# Altium PCB 三轮主控板基础板2.3.PcbDoc (part 1 of 2)
Units mil, origin at the board's own origin, x right, y up, seen from the top; angles counter-clockwise.
Board outline 6000 x 4000 mil, 2 copper layers (Top Layer, Bottom Layer); 78 components, 90 nets, 319 pads, 48 vias.
Unrouted connection lines stored in the file: 1.
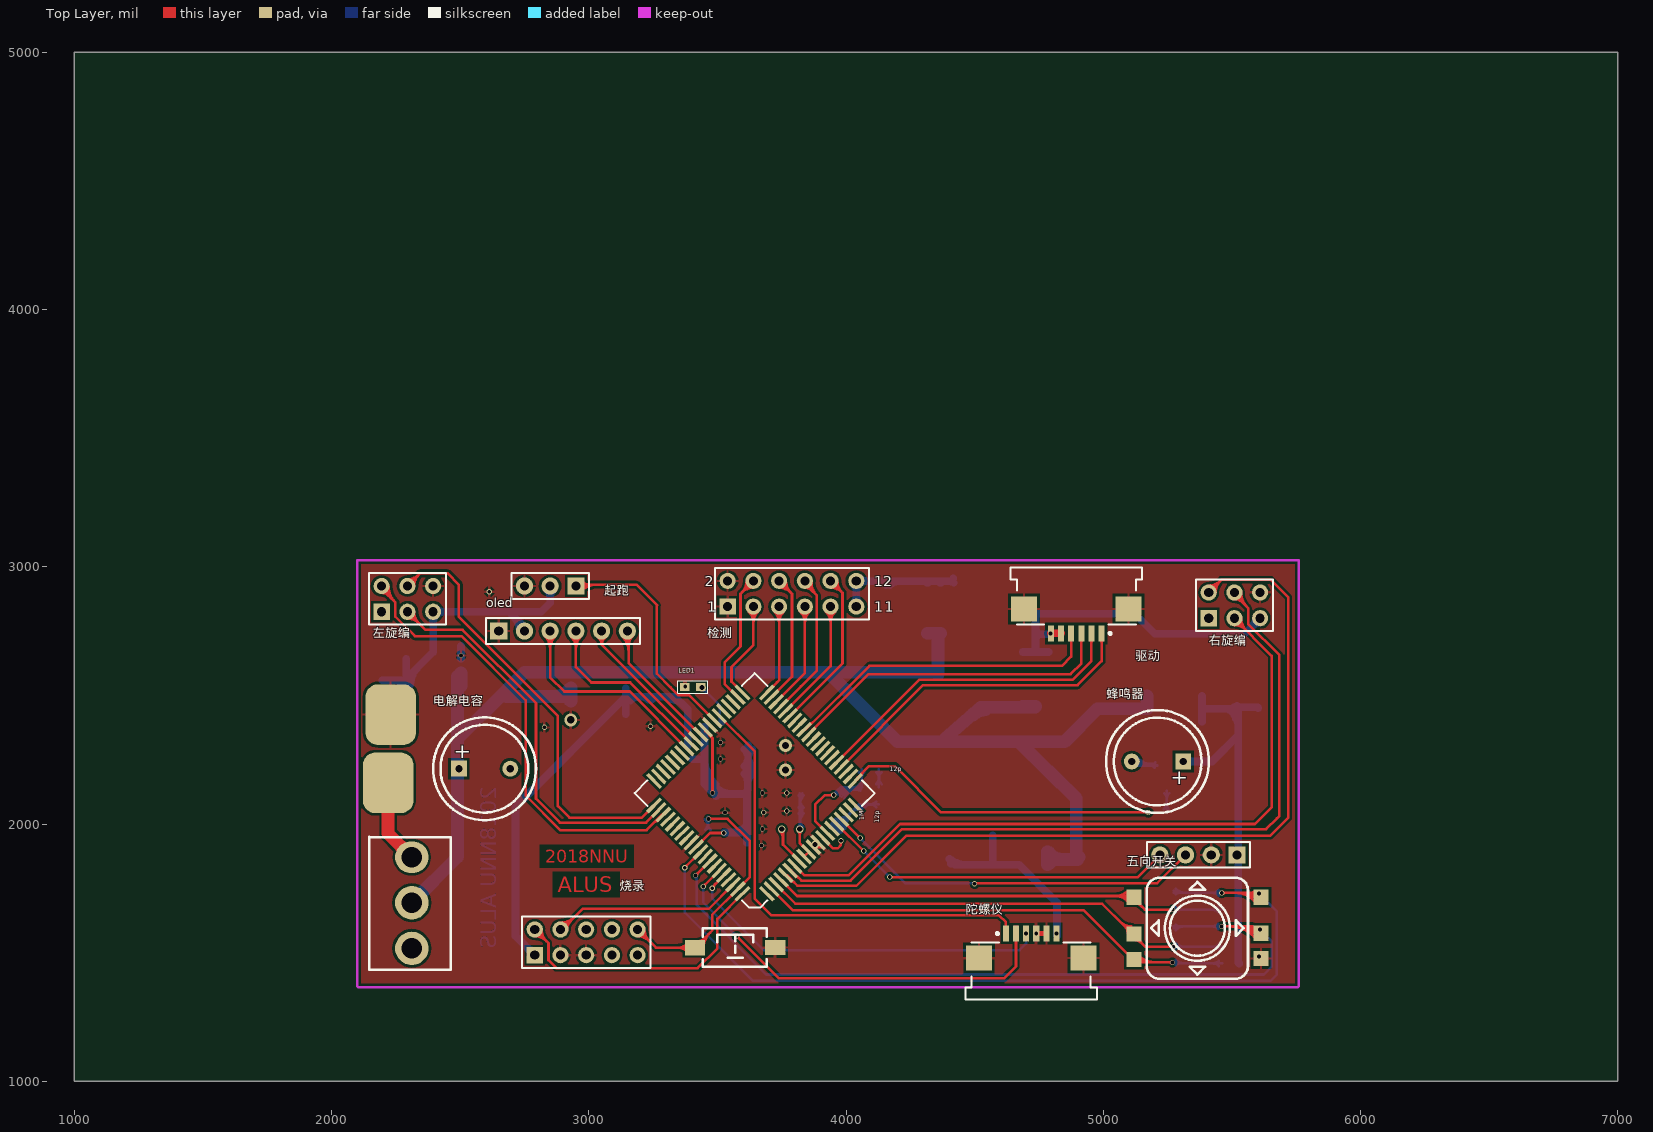
[diagram p0: Top Layer view]
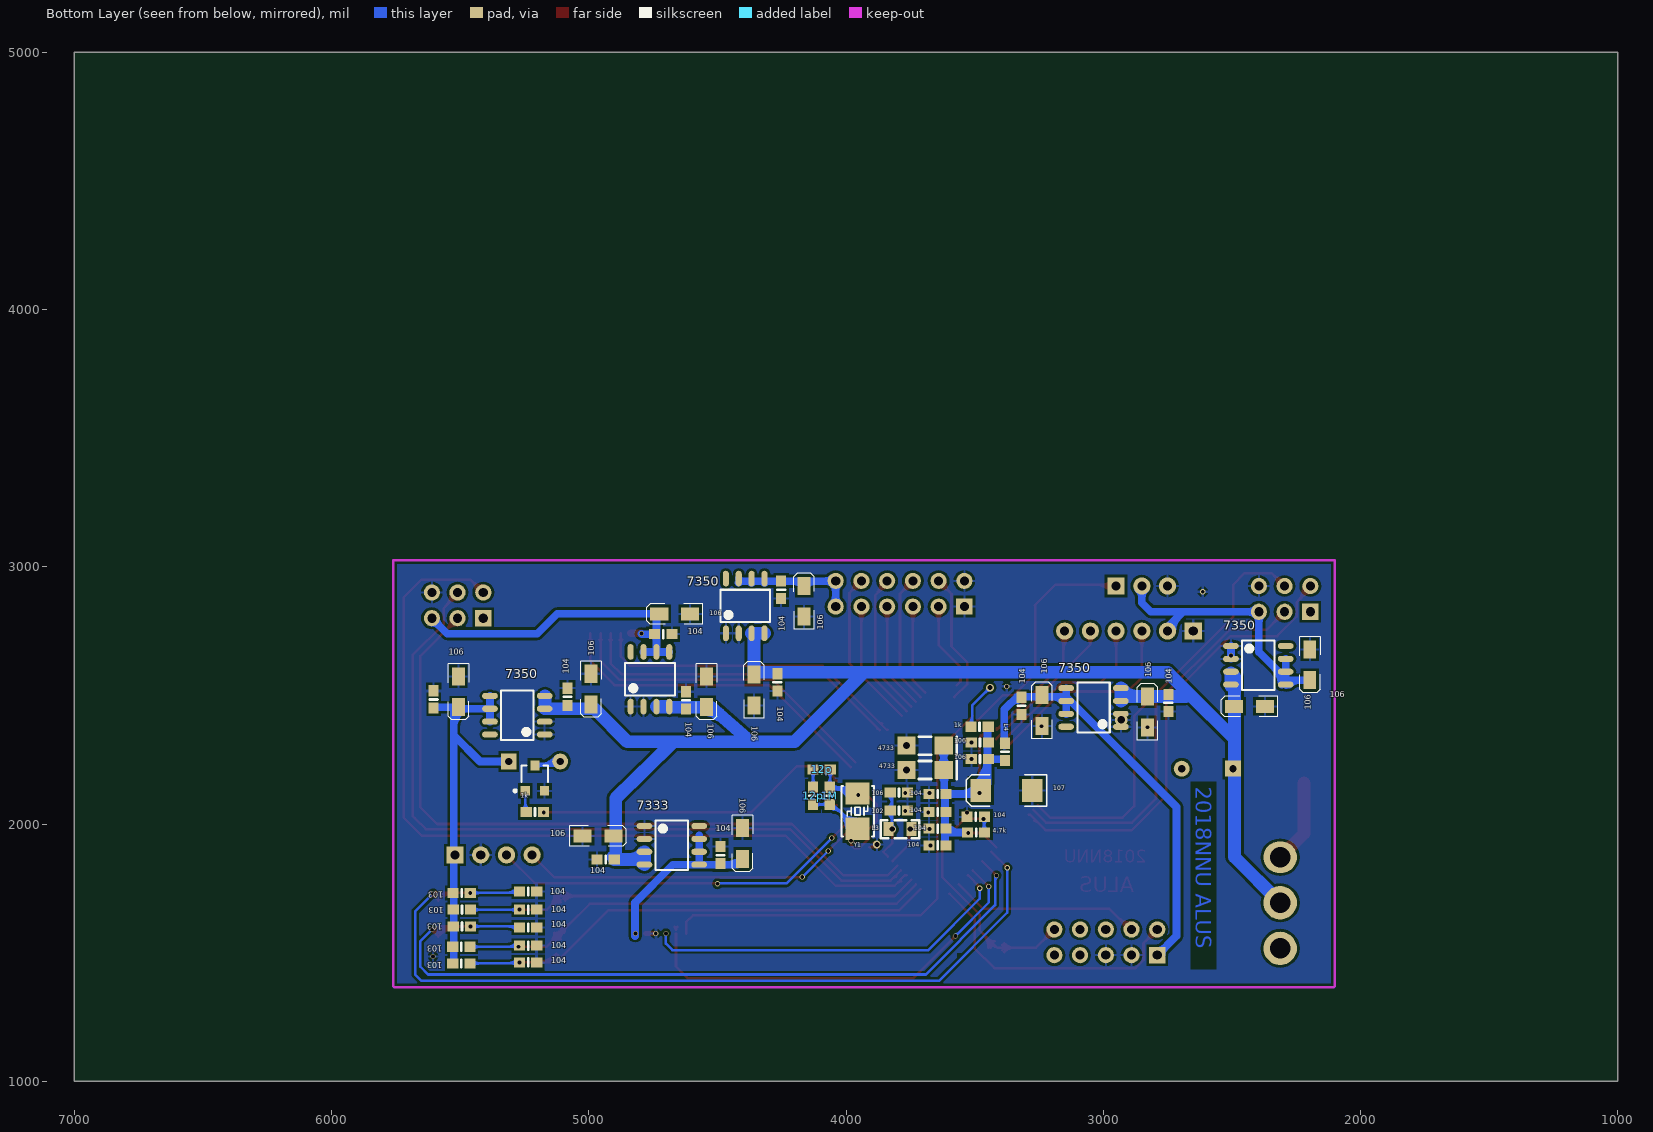
[diagram p1: Bottom Layer view, seen from below]

## Layer stack, top to bottom
Top Layer: signal copper 1.4
Dielectric: dielectric 12.6, FR-4, Dk 4.8
Bottom Layer: signal copper 1.4

## Board outline
1000,1000 7000,1000 7000,5000 1000,5000

## Design rules (kind name [scope] priority, off if disabled: settings)
Clearance [All] p1: gap=10
PolygonConnect [All] p1: connectstyle=Relief reliefconductorwidth=10 reliefentries=4 polygonreliefangle="90 Angle"
RoutingVias [All] p1: holewidth=28 width=50 viastyle="Through Hole" minholewidth=28 minwidth=50 maxholewidth=28 maxwidth=50
SilkscreenOverComponentPads [All] p1: minsilkscreentomaskgap=10
SolderMaskExpansion [All] p1: expansion=4
Width [All] p1: maxlimit=50 minlimit=10 preferedwidth=10
27 further rules are at their usual default settings.

## Classes and differential pairs
component class jicheng: 1k 1M 4.7k 12p 102 103 106 107 4733 CON4 J2 J6 L3 L4 LED1 S9KEAZ128AML U? Y1 五向

## Components (designator, comment, footprint, x,y, rotation, side; value= is the part's Value field where it differs from the comment)
1k "1k" 0603C 3480,2380 r180 bottom (schematic designator R5)
1k "" 0603C 5210,2045 r0 bottom
1M "1M" 0603C 4065,2110 r90 bottom (schematic designator R8)
4.7k "4.7k" 0603C 3495,1965 r0 bottom (schematic designator R7)
12p "12p" 0603C 4130,2110 r90 bottom (schematic designator C23)
12p "12p" 0603C 4095,2210 r0 bottom (schematic designator C21)
102 "102" 0603C 3795,2050 r0 bottom (schematic designator C9)
103 "" 0603C 5493.93,1665 r0 bottom
103 "" 0603C 5495,1525 r180 bottom
103 "" 0603C 5495,1460 r180 bottom
103 "" 0603C 5495,1730 r0 bottom
103 "" 0603C 5493.93,1600 r0 bottom
104 "Comment" 0603C 4490,1880 r90 bottom
104 "Comment" 0603C 4935,1860 r0 bottom
104 "104" 0603C 3495,2030 r180 bottom (schematic designator C20)
104 "104" 0603C 3645,1915 r0 bottom (schematic designator C17)
104 "104" 0603C 3645,2045 r0 bottom (schematic designator C13)
104 "104" 0603C 3645,2115 r0 bottom (schematic designator C10)
104 "104" 0603C 3645,1980 r0 bottom (schematic designator C5)
104 "" 0603C 4265,2550 r270 bottom
104 "" 0603C 4250,2910 r270 bottom
104 "" 0603C 3320,2460 r90 bottom
104 "" 0603C 5085,2495 r90 bottom
104 "" 0603C 4710,2740 r180 bottom
104 "" 0603C 2745,2470 r270 bottom
104 "" 0603C 5235,1740 r180 bottom
104 "" 0603C 5236.07,1525 r0 bottom
104 "" 0603C 5235,1600 r180 bottom
104 "" 0603C 5236.07,1460 r0 bottom
104 "" 0603C 4620,2480 r270 bottom
104 "" 0603C 5236.07,1665 r0 bottom
106 "106" 0603C 3480,2315 r0 bottom (schematic designator C8)
106 "106" 0603C 3480,2250 r0 bottom (schematic designator C7)
106 "10u" 0603C 3795,2120 r0 bottom (schematic designator C4)
106 "" 106 2825,2435 r270 bottom
106 "" 106 4355,2520 r270 bottom
106 "" 106 4545,2515 r90 bottom
106 "" 106 4965,1950 r0 bottom
106 "" 106 2200,2620 r90 bottom
106 "" 106 2430,2460 r180 bottom
106 "" 106 4995,2525 r90 bottom
106 "" 106 5510,2515 r90 bottom
106 "" 106 4665,2820 r180 bottom
106 "" 106 4405,1925 r90 bottom
106 "" 106 4160,2865 r270 bottom
106 "" 106 3235,2440 r270 bottom
107 "100uf" 107 3380,2125 r270 bottom (schematic designator C1)
4733 "4733" SMA 3765,2210 r180 bottom (schematic designator D5)
4733 "4733" SMA 3765,2305 r180 bottom (schematic designator D4)
7333 "TPS7350a" TPS7333 4680,1915 r180 bottom (schematic designator *)
7350 "TPS7350a" TPS7333 3035,2455 r0 bottom (schematic designator *)
7350 "TPS7350a" TPS7333 4390,2845 r90 bottom (schematic designator *)
7350 "TPS7333c" TPS7333 2400,2615 r180 bottom (schematic designator *)
7350 "TPS7350a" TPS7333 5275,2425 r0 bottom (schematic designator *)
* "TPS7350a" TPS7333 4760,2560 r90 bottom
L3 "1000omH" "L 0805" 3790,1980 r0 bottom
L4 "bead" 0603C 3380,2280 r270 bottom
LED1 "红色" 0603r 3405,2530 r180 top
oled "屏幕" HDR2.54-LI-6P 2900,2750 r0 top (schematic designator J6)
RST "3x6x5" "TSW SMD-3*6*2.5" 3570,1520 r0 top
U? "KEAZ128MLK4" TQFP65P1650X1650X150-80N 3645,2120 r135 top
Y1 "16M" "OSC 5032-2P" 3955,2050 r270 bottom
五向开关 "CSW-3P" 五项开关 5380,1590 r270 top
右旋编 "左旋编" HDR2.54-LI-2x3P 5510,2850 r0 top (schematic designator J1)
左旋编 "右旋编" HDR2.54-LI-2x3P 2295,2875 r0 top (schematic designator J2)
检测 "Comment" HDR2.54-LI-2x6P 3790,2895 r0 top
烧录 "Header 5X2" HDR2.54-LI-2x5P 2990,1540 r0 top (schematic designator 烧录口)
电解电容 "Comment" 蜂鸣器#1 2495,2215 r0 top
蜂鸣器 "蜂鸣器" 蜂鸣器#2 5225,2240 r0 top (schematic designator C?)
起跑 "起跑" HDR2.54-LI-3P 2850,2925 r180 top (schematic designator J5)
陀螺仪 "陀螺仪" FH12-6S-1.0SH#1 4720,1510 r0 top (schematic designator J4)
驱动 "驱动" FH12-6S-1.0SH#2 4895,2805 r180 top (schematic designator J3)
? "" NPN 5220,2170 r0 bottom
? "" 开关 2310,1700 r0 top
? "" 电源焊盘 2230,2425 r0 top
? "Comment" 电源焊盘 2220,2160 r0 top
? "Comment" HDR2.54-LI-4P 5370,1880 r180 top
? "Comment" 0603C 5605,2485 r90 bottom

## Footprints (in the part's own frame and the unit in brackets; to place one, negate y for a bottom-side part, rotate by r counter-clockwise, add the part's x,y. Pads: shape width x height; smd on the part's side, far side on the other; paste and mask are expansions set on the pad)
106 [mil]
  rect 70.08x50 smd: 1(-61,-3) 2(59.08,-3)
  silkscreen extent -110,-43 108,37
107 [mil]
  rect 89.76x79.92 smd: 1(-5,-96) 2(-5,104)
  silkscreen extent -66,-152 56,160
0603C [mm]
  rect 1.1x1 smd: 1(-0.864,-0.051) 2(0.836,-0.051)
  silkscreen extent -0.03,-0.43 -0.03,0.33
0603r [mm]
  rect 0.965x0.8 smd: 1(-0.762,-0.051) 2(0.813,-0.051)
  silkscreen extent -1.45,-0.66 1.5,0.56
FH12-6S-1.0SH#1 [mm] "Connector; FH12 Ser"
  rect 2.6x2.5 smd: 0(-5.156,-0.787) 0(5.156,-0.787)
  rect 0.6x1.6 smd: 1(-2.5,1.625) 3(-0.5,1.625) 4(0.5,1.625) 5(1.5,1.625) 6(2.5,1.625)
  rect 0.6x1.6 smd paste+0: 2(-1.5,1.625)
  silkscreen extent -6.5,-4.88 6.48,1.75, body extent -6.5,-4.9 6.5,1.9, height 2.8
FH12-6S-1.0SH#2 [mm] "Connector; FH12 Ser"
  rect 2.6x2.5 smd: 0(-5.156,-0.787) 0(5.156,-0.787)
  rect 0.6x1.6 smd: 1(-2.5,1.625) 2(-1.5,1.625) 3(-0.5,1.625) 4(0.5,1.625) 5(1.5,1.625) 6(2.5,1.625)
  silkscreen extent -6.5,-4.88 6.48,1.75, body extent -6.5,-4.9 6.5,1.9, height 2.8
HDR2.54-LI-2x3P [mm]
  rect 1.6x1.6 hole 0.9: 1(-2.54,-1.27)
  round 1.6 hole 0.9: 2(-2.54,1.27) 3(0,-1.27) 4(0,1.27) 5(2.54,-1.27) 6(2.54,1.27)
  silkscreen extent -3.81,-2.54 3.81,2.54, body extent -3.81,-2.54 3.81,2.54, height 8.5
HDR2.54-LI-2x5P [mm]
  rect 1.6x1.6 hole 0.9: 1(-5.08,-1.27)
  round 1.6 hole 0.9: 2(-5.08,1.27) 3(-2.54,-1.27) 4(-2.54,1.27) 5(0,-1.27) 6(0,1.27) 7(2.54,-1.27) 8(2.54,1.27) 9(5.08,-1.27) 10(5.08,1.27)
  silkscreen extent -6.35,-2.54 6.35,2.54, body extent -6.35,-2.54 6.35,2.54, height 8.5
HDR2.54-LI-2x6P [mm]
  rect 1.6x1.6 hole 0.9: 1(-6.35,-1.27)
  round 1.6 hole 0.9: 2(-6.35,1.27) 3(-3.81,-1.27) 4(-3.81,1.27) 5(-1.27,-1.27) 6(-1.27,1.27) 7(1.27,-1.27) 8(1.27,1.27) 9(3.81,-1.27) 10(3.81,1.27) 11(6.35,-1.27) 12(6.35,1.27)
  silkscreen extent -7.62,-2.54 7.62,2.54, body extent -7.62,-2.54 7.62,2.54, height 8.5
HDR2.54-LI-3P [mm]
  rect 1.7x1.7 hole 0.9: 1(-2.54,0)
  round 1.7 hole 0.9: 2(0,0) 3(2.54,0)
  silkscreen extent -3.81,-1.27 3.81,1.27, body extent -3.81,-1.27 3.81,1.27, height 8.5
HDR2.54-LI-4P [mm]
  rect 1.7x1.7 hole 0.9: 1(-3.81,0)
  round 1.7 hole 0.9: 2(-1.27,0) 3(1.27,0) 4(3.81,0)
  silkscreen extent -5.08,-1.27 5.08,1.27, body extent -5.08,-1.27 5.08,1.27, height 8.5
HDR2.54-LI-6P [mm]
  rect 1.7x1.7 hole 0.9: 1(-6.35,0)
  round 1.7 hole 0.9: 2(-3.81,0) 3(-1.27,0) 4(1.27,0) 5(3.81,0) 6(6.35,0)
  silkscreen extent -7.62,-1.27 7.62,1.27, body extent -7.62,-1.27 7.62,1.27, height 8.5
"L 0805" [mil] "小功率"
  rect 40x55 smd: 1(-45,0) 2(45,0)
  silkscreen extent -75,-35 75,35, body extent -39,-24 39,24, height 35
NPN [mm]
  rect 0.9x0.95 smd: 1(0.686,1.041) 2(-1.214,1.041) 3(-0.264,-1.459)
  silkscreen extent -1.56,-1.46 1.81,1.17
"OSC 5032-2P" [mm]
  rect 2.2x2.4 smd: 1(-1.75,0) 2(1.75,0)
  silkscreen extent -2.5,-1.6 2.5,1.6, body extent -2.5,-1.6 2.5,1.6, height 0.86
SMA [mm]
  rect 1.8x1.8 smd: A(0,0) K(3.68,0)
  silkscreen extent 1.19,-0.89 4.95,0.89
TPS7333 [mm]
  oval 1.55x0.6 smd: 1(-2.631,1.956) 2(-2.631,0.686) 3(-2.631,-0.584) 4(-2.631,-1.854) 5(2.769,-1.854) 6(2.769,-0.584) 7(2.769,0.686) 8(2.769,1.956)
  silkscreen extent -1.53,-2.4 1.67,2.5
TQFP65P1650X1650X150-80N [mm]
  rect 1.9x0.35 smd: 1(-7.875,6.175) 2(-7.875,5.525) 3(-7.875,4.875) 4(-7.875,4.225) 5(-7.875,3.575) 6(-7.875,2.925) 7(-7.875,2.275) 8(-7.875,1.625) 9(-7.875,0.975) 10(-7.875,0.325) 11(-7.875,-0.325) 12(-7.875,-0.975) 13(-7.875,-1.625) 14(-7.875,-2.275) 15(-7.875,-2.925) 16(-7.875,-3.575) 17(-7.875,-4.225) 18(-7.875,-4.875) 19(-7.875,-5.525) 20(-7.875,-6.175) 41(7.875,-6.175) 42(7.875,-5.525) 43(7.875,-4.875) 44(7.875,-4.225) 45(7.875,-3.575) 46(7.875,-2.925) 47(7.875,-2.275) 48(7.875,-1.625) 49(7.875,-0.975) 50(7.875,-0.325) 51(7.875,0.325) 52(7.875,0.975) 53(7.875,1.625) 54(7.875,2.275) 55(7.875,2.925) 56(7.875,3.575) 57(7.875,4.225) 58(7.875,4.875) 59(7.875,5.525) 60(7.875,6.175)
  rect 0.35x1.9 smd: 21(-6.175,-7.875) 22(-5.525,-7.875) 23(-4.875,-7.875) 24(-4.225,-7.875) 25(-3.575,-7.875) 26(-2.925,-7.875) 27(-2.275,-7.875) 28(-1.625,-7.875) 29(-0.975,-7.875) 30(-0.325,-7.875) 31(0.325,-7.875) 32(0.975,-7.875) 33(1.625,-7.875) 34(2.275,-7.875) 35(2.925,-7.875) 36(3.575,-7.875) 37(4.225,-7.875) 38(4.875,-7.875) 39(5.525,-7.875) 40(6.175,-7.875) 61(6.175,7.875) 62(5.525,7.875) 63(4.875,7.875) 64(4.225,7.875) 65(3.575,7.875) 66(2.925,7.875) 67(2.275,7.875) 68(1.625,7.875) 69(0.975,7.875) 70(0.325,7.875) 71(-0.325,7.875) 72(-0.975,7.875) 73(-1.625,7.875) 74(-2.275,7.875) 75(-2.925,7.875) 76(-3.575,7.875) 77(-4.225,7.875) 78(-4.875,7.875) 79(-5.525,7.875) 80(-6.175,7.875)
  silkscreen extent -8.38,-8.38 8.38,8.38
"TSW SMD-3*6*2.5" [mm]
  rect 2x1.5 smd: 1(-3.996,-0.02) 2(3.937,0)
  silkscreen extent -3.21,-1.9 3.09,1.9, body extent -4,-1.88 4,1.62, height 2.59
五项开关 [mm]
  rect 1.5x1.5 smd: 1(-3.175,-6.626) 2(0.46,-6.626) 3(2.952,-6.626) 4(2.873,5.914) 5(0.381,5.914) 6(-3.175,5.914)
  silkscreen extent -5.13,-5.36 4.87,4.64
开关 [mil]
  oval 130x123 hole 80: 1(2,171)
  round 130 hole 80: 2(2,-6.17) 3(2,-183.33)
  silkscreen extent -164,-266 153,251
电源焊盘 [mm]
  rrect50% 5x6 smd: 1(0,0)
蜂鸣器#1 [mil]
  rect 62x62 hole 28: 1(0,0)
  round 62 hole 28: 2(200,0)
  silkscreen extent -100,-200 300,200
蜂鸣器#2 [mil]
  rect 62x62 hole 28: 1(86,3)
  round 62 hole 28: 2(-114,3)
  silkscreen extent -214,-197 186,203

## Part data
陀螺仪 驱动: library part CON6

## Via types
v1: diameter 20, hole 15, Top Layer to Bottom Layer, 41 vias
v2: diameter 30, hole 20, Top Layer to Bottom Layer, 4 vias
v3: diameter 50, hole 28, Top Layer to Bottom Layer, 3 vias

## Nets (pads, with @x,y where several pads share a name; then routed paths per layer and width w, separated by ;. In a path a pad name is that pad's centre, name@x,y a point inside that pad or via, vN(x,y) a via of type N, cw(c..) or ccw(c..) an arc to the next point about the centre after c; other vN are vias at no path point)
3.3V: 104.1@4488,1846 106.1@4402,1864 7333.5 7333.6 7333.7 陀螺仪.6 | length 860.5
  Bottom Layer w30: 106.1@4402,1864 4424,1842 7333.5@4571,1842 ; 106.1@4407.79,1845.81 cw(c4421.51,1826.47) 4433.37,1847 ; 4570,1955 4571,1954 7333.5@4571,1842 ; v1@4820,1565 4820,1695 4673,1842 7333.5@4571,1842 ; 106.1@4409.07,1861.03 ccw(c4455.02,1906.98) 4455.02,1842 cw(c4455.02,1906.98) 106.1@4409.07,1861.03
  other v1: 4818.42,1573.98
5V: 104.2@3318,2492.93 106.1@3238,2501 7350.5@3144,2528 7350.6@3144,2478 7350.7@3144,2428 L4.1 烧录.1 | length 2407.4
  Bottom Layer w30: 烧录.1@2790,1490 2715,1565 2715,2066 3144,2495 ; 7350.7@3144,2428 7350.6@3144,2478 3144,2495 ; 7350.5@3144,2528 3144,2495 ; L4.1@3385,2304.99 3385,2445 3335,2495 3144,2495 ; 烧录.1@2761.84,1518.16 cw(c2733.68,1490) 2773.5,1490 ccw(c2733.68,1490) 烧录.1@2761.84,1518.16 ; 烧录.1@2761.84,1518.16 ccw(c2790,1546.32) 2790,1506.5 cw(c2790,1546.32) 烧录.1@2761.84,1518.16 ; 7350.6@3141.17,2476.52 cw(c3155.16,2483.84) 3144,2495 ; 7350.6@3141.17,2476.52 cw(c3155.16,2483.84) 3144,2495 ; 7350.6@3141.17,2476.52 cw(c3155.16,2483.84) 3144,2495 ; 7350.6@3160.45,2480.25 cw(c3196.04,2444.66) 3196.04,2495 ; 7350.6@3160.45,2480.25 cw(c3196.04,2444.66) 3196.04,2495 ; 7350.6@3160.45,2480.25 cw(c3196.04,2444.66) 3196.04,2495 ; 3204.11,2495 cw(c3204.11,2457.07) 106.1@3230.93,2483.89 ; 3204.11,2495 cw(c3204.11,2457.07) 106.1@3230.93,2483.89 ; 3204.11,2495 cw(c3204.11,2457.07) 106.1@3230.93,2483.89 ; 106.1@3245.07,2483.89 cw(c3271.89,2457.07) 3271.89,2495 ; 106.1@3245.07,2483.89 cw(c3271.89,2457.07) 3271.89,2495 ; 106.1@3245.07,2483.89 cw(c3271.89,2457.07) 3271.89,2495 ; 104.2@3318,2486.28 cw(c3318,2424.17) 3361.91,2468.09 ; 104.2@3318,2486.28 cw(c3318,2424.17) 3361.91,2468.09 ; 104.2@3318,2486.28 cw(c3318,2424.17) 3361.91,2468.09 ; 104.2@3322.06,2493.3 ccw(c3345.23,2506.68) 3338.31,2480.83 ; 104.2@3322.06,2493.3 ccw(c3345.23,2506.68) 3338.31,2480.83 ; 104.2@3322.06,2493.3 ccw(c3345.23,2506.68) 3338.31,2480.83
5V1: 
5V2: 106.1@2197,2559 7350.5@2291,2542 7350.6@2291,2592 7350.7@2291,2642 oled.2 左旋编.5 起跑.2 | length 1947.8
  Bottom Layer w30: 106.1@2197,2559 2285,2559 2291,2565 ; 2238.96,2559 cw(c2238.96,2508.66) 7350.5@2274.55,2544.25 ; 7350.5@2276.51,2542 cw(c2297.06,2542) 2282.53,2556.53 ; 7350.5@2288.31,2540.28 cw(c2305.03,2550.97) 2291,2565 ; 7350.5@2291,2542 2291,2565 ; 7350.7@2291,2642 7350.6@2291,2592 2291,2565 ; 7350.5@2306.51,2542 cw(c2399.49,2542) 2333.74,2607.74 ; 左旋编.5@2383.34,2813.34 cw(c2355.18,2785.18) 2395,2785.18 cw(c2434.82,2785.18) 左旋编.5@2406.66,2813.34 ; 左旋编.5@2395,2825 2395,2669 2291,2565 ; 2690,2825 oled.2@2760,2755 ; 起跑.2@2837.68,2920 起跑.2@2850,2920 ; 左旋编.5@2406.66,2813.34 cw(c2434.82,2785.18) 2434.82,2825 ; 左旋编.5@2406.66,2813.34 cw(c2434.82,2785.18) 2434.82,2825 ; 左旋编.5@2406.66,2813.34 cw(c2434.82,2785.18) 2434.82,2825 ; 左旋编.5@2406.66,2836.66 ccw(c2434.82,2864.82) 2434.82,2825 ; 左旋编.5@2406.66,2836.66 ccw(c2434.82,2864.82) 2434.82,2825 ; 左旋编.5@2406.66,2836.66 ccw(c2434.82,2864.82) 2434.82,2825 ; 左旋编.5@2407.72,2814.5 cw(c2430,2796.12) 2430,2825 ; 左旋编.5@2407.72,2814.5 cw(c2430,2796.12) 2430,2825 ; 左旋编.5@2407.72,2814.5 cw(c2430,2796.12) 2430,2825 ; 左旋编.5@2407.72,2835.5 ccw(c2430,2853.88) 2430,2825 ; 左旋编.5@2407.72,2835.5 ccw(c2430,2853.88) 2430,2825 ; 左旋编.5@2407.72,2835.5 ccw(c2430,2853.88) 2430,2825 ; 2430,2825 2815,2825 2850,2860 起跑.2@2850,2920 ; 2850,2880.42 cw(c2894.58,2880.42) 2863.06,2911.94 ccw(c2894.58,2880.42) 2850,2880.42 ; 2850,2880.42 ccw(c2805.42,2880.42) 2836.94,2911.94 cw(c2805.42,2880.42) 2850,2880.42 ; 起跑.2@2850,2920 起跑.2@2850,2925 2855,2920 起跑.2@2850,2920 ; 2707.87,2807.13 cw(c2650.75,2750) 2731.54,2750 ccw(c2650.75,2750) 2707.87,2807.13
5V3: 104.1@4744,2738 106.1@4726,2817 *.5 *.6 *.7 右旋编.5 驱动.5 驱动.6 | length 1542.2
  Top Layer w30: 驱动.6@4796.58,2741.02 驱动.5@4835.95,2741.02
  Bottom Layer w30: *.5@4687,2669 *.6@4737,2669 ; 104.1@4744,2738 4793,2738 v1(4795,2740) ; *.7@4787,2669 *.6@4737,2669 ; 右旋编.5@5610,2800 5550,2740 5200,2740 5123,2817 106.1@4726,2817 4737,2806 *.6@4737,2669 ; 5581.84,2771.84 cw(c5610,2743.68) 5610,2783.5 ccw(c5610,2743.68) 5581.84,2771.84 ; 5581.84,2771.84 ccw(c5553.68,2800) 5593.5,2800 cw(c5553.68,2800) 5581.84,2771.84 ; 106.1@4728.97,2809.93 cw(c4709.58,2790.54) 4737,2790.54 ccw(c4709.58,2790.54) 106.1@4728.97,2809.93 ; 4737,2714.54 cw(c4765.49,2714.54) 4745.34,2734.69 ccw(c4765.49,2714.54) 4737,2714.54 ; 4737,2761.46 ccw(c4765.49,2761.46) 4745.34,2741.31 cw(c4765.49,2761.46) 4737,2761.46
5V4: 104.1@4252,2944 106.1@4163,2926 7350.5@4317,2954 7350.6@4367,2954 7350.7@4417,2954 检测.11 检测.12 | length 1186.6
  Bottom Layer w30: 检测.11@4040,2845 检测.12@4040,2945 ; 检测.12@4044,2944 104.1@4252,2944 4407,2944 7350.7@4417,2954 ; 4040,2884.82 cw(c4000.18,2884.82) 4028.34,2856.66 ccw(c4000.18,2884.82) 4040,2884.82 ; 4040,2884.82 ccw(c4079.82,2884.82) 4051.66,2856.66 cw(c4079.82,2884.82) 4040,2884.82 ; 4040,2905.18 cw(c4079.82,2905.18) 检测.12@4051.66,2933.34 ; 4040,2905.18 ccw(c4000.18,2905.18) 4028.34,2933.34 cw(c4000.18,2905.18) 4040,2905.18 ; 4040,2905.18 cw(c4079.82,2905.18) 检测.12@4051.66,2933.34 ; 检测.12@4051.66,2933.34 cw(c4077.41,2907.59) 4077.41,2944 ccw(c4077.41,2907.59) 检测.12@4051.66,2933.34 ; 检测.12@4051.66,2956.66 ccw(c4082.24,2987.24) 4082.24,2944 cw(c4082.24,2987.24) 检测.12@4051.66,2956.66 ; 4119.64,2944 cw(c4119.64,2892.68) 4155.93,2928.97 ccw(c4119.64,2892.68) 4119.64,2944 ; 106.1@4170.07,2928.97 cw(c4206.36,2892.68) 4206.36,2944 ccw(c4206.36,2892.68) 106.1@4170.07,2928.97 ; 4303.69,2944 cw(c4303.69,2921.99) 4319.25,2937.55 ccw(c4303.69,2921.99) 4303.69,2944 ; 7350.5@4314.75,2937.55 cw(c4330.31,2921.99) 4330.31,2944 ccw(c4330.31,2921.99) 7350.5@4314.75,2937.55 ; 4353.69,2944 cw(c4353.69,2921.99) 4369.25,2937.55 ccw(c4353.69,2921.99) 4353.69,2944 ; 7350.6@4364.75,2937.55 cw(c4380.31,2921.99) 4380.31,2944 ccw(c4380.31,2921.99) 7350.6@4364.75,2937.55 ; 4403.69,2944 cw(c4403.69,2921.99) 4419.25,2937.55 ccw(c4403.69,2921.99) 4403.69,2944
5V5: 103.1@5529,1458 103.1@5529,1523 103.2@5526.86,1602 103.2@5526.86,1667 103.2@5527.93,1732 106.1@5507,2454 7350.5@5384,2498 7350.6@5384,2448 7350.7@5384,2398 ?.1@5520,1880 ?.1@5603,2451 蜂鸣器.1 | length 1923.2
  Bottom Layer w30: 蜂鸣器.1@5311,2243 5423,2243 5525,2345 ; 7350.7@5384,2398 7350.5@5384,2498 ; 7350.6@5384,2448 106.1@5525,2448 ; 5473.11,2448 cw(c5473.11,2410.07) 106.1@5499.93,2436.89 ; 106.1@5507,2454 106.1@5525,2454 ; 106.1@5516.34,2440.39 ccw(c5556.75,2424.97) 5519.29,2403.35 ; 106.1@5520,2459 106.1@5525,2454 ; 103.1@5529,1458 5525,1462 5525,1880 5525,2345 ; ?.1@5603,2451 5600,2454 106.1@5525,2454 ; 5349.63,2243 cw(c5349.63,2281.63) 5322.31,2254.31 ccw(c5349.63,2281.63) 5349.63,2243 ; 5349.63,2243 ccw(c5349.63,2204.37) 5322.31,2231.69 cw(c5349.63,2204.37) 5349.63,2243 ; 106.1@5499.93,2436.89 cw(c5439.4,2376.36) 5525,2376.36 ccw(c5439.4,2376.36) 106.1@5499.93,2436.89 ; 5525,2345 106.1@5525,2448 ; 106.1@5525,2448 106.1@5525,2454
7.2V: 104.1@2747,2504 104.1@4267,2584 104.1@4901,1862 104.1@5083,2461 104.2@4622,2447.07 106.1@2491,2457 106.1@2828,2496 106.1@4358,2581 106.1@4542,2454 106.1@4904,1953 106.1@4992,2464 7333.3 7333.4 7350.3 7350.4 *.3 *.4 ?.1@2220,2160 ?.1@2312,1871 ?.2@2312,1693.83 电解电容.1 | length 7118.9
  Top Layer w50: ?.1@2220,2160 2220,1963 ?.1@2312,1871
  Bottom Layer w50: ?.2@2312,1693.83 2490,1871.83 2490,2330 ; 7350.4@2490.9,2538.43 cw(c2538.72,2551.87) 7350.3@2503.6,2587 ; 7350.4@2503.6,2537 7350.4@2503.6,2542 7350.3@2503.6,2587 ; 2931,2496 106.1@2828,2496 2679,2496 2667.5,2507.5 ; 7350.3@2931.4,2478 7350.4@2931.4,2528 ; 7350.4@4317,2741.4 7350.3@4367,2741.4 ; 7350.3@4358,2737 106.1@4358,2581 4349,2590 3930,2590 ; 4370,2320 4524,2454 106.1@4542,2454 *.3@4734.6,2454 ; 4493.96,2427.86 cw(c4537.41,2377.92) 4542,2443.96 ccw(c4542,2376.27) 4494.13,2424.13 ; *.4@4687,2456.4 *.3@4737,2456.4 ; 7333.4@4783.6,1842 7333.3@4783.6,1892 ; 7333.4@4789.56,1845.41 cw(c4800.82,1842.4) 7333.4@4794.99,1852.49 ; 7333.3@4789.56,1888.59 ccw(c4800.82,1891.6) 7333.3@4794.99,1881.51 ; 4803.6,1862 104.1@4901,1862 ; 104.1@4906,1872 4895,1883 4895,2100 4670,2320 ; 7350.4@5170,2498 5170,2448 4978,2448 4850,2320 4670,2320 ; 2490,2330 2490,2573.4 7350.3@2503.6,2587 ; 2490,2330 2667.5,2507.5 ; 2667.5,2507.5 2750,2590 3930,2590 ; 2867.29,2496 ccw(c2867.29,2573.41) 7350.4@2922.03,2518.67 ; 2867.29,2496 ccw(c2867.29,2573.41) 7350.4@2922.03,2518.67 ; 2867.29,2496 ccw(c2867.29,2573.41) 7350.4@2922.03,2518.67 ; 2901.09,2496 cw(c2901.09,2466.39) 7350.3@2922.03,2487.33 ; 2901.09,2496 cw(c2901.09,2466.39) 7350.3@2922.03,2487.33 ; 2901.09,2496 cw(c2901.09,2466.39) 7350.3@2922.03,2487.33 ; 7350.3@2920.01,2488.49 cw(c2914.18,2478.4) 7350.3@2925.44,2481.41 ; 7350.3@2920.01,2488.49 cw(c2914.18,2478.4) 7350.3@2925.44,2481.41 ; 7350.3@2920.01,2488.49 cw(c2914.18,2478.4) 7350.3@2925.44,2481.41 ; 7350.4@2920.01,2517.51 ccw(c2914.18,2527.6) 7350.4@2925.44,2524.59 ; 7350.4@2920.01,2517.51 ccw(c2914.18,2527.6) 7350.4@2925.44,2524.59 ; 7350.4@2920.01,2517.51 ccw(c2914.18,2527.6) 7350.4@2925.44,2524.59 ; 3930,2590 4200,2320 4670,2320 ; 7333.4@4792.97,1851.33 cw(c4818.74,1825.56) 4818.74,1862 ccw(c4818.74,1825.56) 7333.4@4792.97,1851.33 ; 7333.3@4792.97,1882.67 ccw(c4842.88,1932.59) 4842.88,1862 cw(c4842.88,1932.59) 7333.3@4792.97,1882.67
EXTAL: 1M.1 12p.1@4128,2076 U?.13 Y1.2 | length 3336.8
  Top Layer w10: U?.13@3909.47,1946.01 3950,1905.48 3967.98,1905.48 3980,1917.5 v1(3980,1935) ; v1@3976.46,1931.46 cw(c3967.93,1922.93) 3980,1922.93 ; v1@3976.46,1931.46 cw(c3967.93,1922.93) 3980,1922.93 ; v1@3976.46,1931.46 cw(c3967.93,1922.93) 3980,1922.93 ; 3980,1922.93 cw(c3992.07,1922.93) v1@3983.54,1931.46 ; 3980,1922.93 cw(c3992.07,1922.93) v1@3983.54,1931.46 ; 3980,1922.93 cw(c3992.07,1922.93) v1@3983.54,1931.46
  Bottom Layer w10: Y1.2@3965.48,1970.62 Y1.2@3955,1981.1 4049.9,2076 1M.1@4063,2076 12p.1@4128,2076 ; 4039.91,2055.51 cw(c4052.6,2043.9) 1M.1@4058.21,2060.15 ; 4043.1,2058.99 ccw(c4028.35,2072.5) 1M.1@4048.33,2073.38 ; Y1.2@3937.54,1984.66 cw(c3984.7,1976.82) Y1.2@3972.32,2023 ; Y1.2@3937.54,1984.66 cw(c3984.7,1976.82) Y1.2@3972.32,2023 ; Y1.2@3937.54,1984.66 cw(c3984.7,1976.82) Y1.2@3972.32,2023 ; Y1.2@3947.4,1983.02 cw(c4001.52,1974.02) 3987.32,2027.02 ; Y1.2@3947.4,1983.02 cw(c4001.52,1974.02) 3987.32,2027.02 ; Y1.2@3947.4,1983.02 cw(c4001.52,1974.02) 3987.32,2027.02 ; Y1.2@3957.27,1981.38 cw(c4018.35,1971.22) 4002.32,2031.04 ; Y1.2@3957.27,1981.38 cw(c4018.35,1971.22) 4002.32,2031.04 ; Y1.2@3957.27,1981.38 cw(c4018.35,1971.22) 4002.32,2031.04 ; Y1.2@3958.94,2009.41 ccw(c3958.94,2068.24) 4000.54,2026.64 ; Y1.2@3958.94,2009.41 ccw(c3958.94,2068.24) 4000.54,2026.64 ; Y1.2@3958.94,2009.41 ccw(c3958.94,2068.24) 4000.54,2026.64 ; Y1.2@3958.94,2019.41 ccw(c3958.94,2102.39) 4017.61,2043.71 ; Y1.2@3958.94,2019.41 ccw(c3958.94,2102.39) 4017.61,2043.71 ; Y1.2@3958.94,2019.41 ccw(c3958.94,2102.39) 4017.61,2043.71 ; Y1.2@3959.33,1979.46 ccw(c3943.04,2046.9) 4010.06,2028.95 ; Y1.2@3959.33,1979.46 ccw(c3943.04,2046.9) 4010.06,2028.95 ; Y1.2@3959.33,1979.46 ccw(c3943.04,2046.9) 4010.06,2028.95 ; Y1.2@3961.68,1969.74 ccw(c3947.54,2028.27) 4005.71,2012.68 ; Y1.2@3961.68,1969.74 ccw(c3947.54,2028.27) 4005.71,2012.68 ; Y1.2@3961.68,1969.74 ccw(c3947.54,2028.27) 4005.71,2012.68 ; Y1.2@3964.03,1960.02 ccw(c3952.04,2009.63) Y1.2@4001.35,1996.42 ; Y1.2@3964.03,1960.02 ccw(c3952.04,2009.63) Y1.2@4001.35,1996.42 ; Y1.2@3964.03,1960.02 ccw(c3952.04,2009.63) Y1.2@4001.35,1996.42 ; Y1.2@3977.24,1981.1 cw(c4030.95,1981.1) Y1.2@3992.97,2019.08 ; Y1.2@3977.24,1981.1 cw(c4030.95,1981.1) Y1.2@3992.97,2019.08 ; Y1.2@3977.24,1981.1 cw(c4030.95,1981.1) Y1.2@3992.97,2019.08 ; Y1.2@3987.24,1981.1 cw(c4065.09,1981.1) 4010.04,2036.15 ; Y1.2@3987.24,1981.1 cw(c4065.09,1981.1) 4010.04,2036.15 ; Y1.2@3987.24,1981.1 cw(c4065.09,1981.1) 4010.04,2036.15 ; Y1.2@3997.24,1981.1 cw(c4099.23,1981.1) 4027.12,2053.22 ; Y1.2@3997.24,1981.1 cw(c4099.23,1981.1) 4027.12,2053.22 ; Y1.2@3997.24,1981.1 cw(c4099.23,1981.1) 4027.12,2053.22 ; 4012.2,2038.31 cw(c4063,1987.51) 1M.1@4063,2059.35 ; 4012.2,2038.31 cw(c4063,1987.51) 1M.1@4063,2059.35 ; 4012.2,2038.31 cw(c4063,1987.51) 1M.1@4063,2059.35 ; 4025.29,2049.24 ccw(c4011.47,2100.82) 1M.1@4058.84,2076.19 ; 4025.29,2049.24 ccw(c4011.47,2100.82) 1M.1@4058.84,2076.19 ; 4025.29,2049.24 ccw(c4011.47,2100.82) 1M.1@4058.84,2076.19 ; 4029.27,2055.38 cw(c4063,2021.65) 1M.1@4063,2069.35 ; 4029.27,2055.38 cw(c4063,2021.65) 1M.1@4063,2069.35 ; 4029.27,2055.38 cw(c4063,2021.65) 1M.1@4063,2069.35 ; 4040.48,2063.31 cw(c4045.66,2043.99) 1M.1@4055.66,2061.31 ; 4040.48,2063.31 cw(c4045.66,2043.99) 1M.1@4055.66,2061.31 ; 4040.48,2063.31 cw(c4045.66,2043.99) 1M.1@4055.66,2061.31 ; 1M.1@4047.22,2055.12 ccw(c4038.78,2086.62) 1M.1@4067.72,2071.58 ; 1M.1@4047.22,2055.12 ccw(c4038.78,2086.62) 1M.1@4067.72,2071.58 ; 1M.1@4047.22,2055.12 ccw(c4038.78,2086.62) 1M.1@4067.72,2071.58 ; 1M.1@4073.38,2065.62 cw(c4098.45,2040.55) 4098.45,2076 ; 1M.1@4073.38,2065.62 cw(c4098.45,2040.55) 4098.45,2076 ; 1M.1@4073.38,2065.62 cw(c4098.45,2040.55) 4098.45,2076 ; 1M.1@4073.38,2086.38 ccw(c4098.45,2111.45) 4098.45,2076 ; 1M.1@4073.38,2086.38 ccw(c4098.45,2111.45) 4098.45,2076 ; 1M.1@4073.38,2086.38 ccw(c4098.45,2111.45) 4098.45,2076 ; 4092.55,2076 cw(c4092.55,2040.55) 12p.1@4117.62,2065.62 ; 4092.55,2076 ccw(c4092.55,2111.45) 12p.1@4117.62,2086.38 ; 4092.55,2076 cw(c4092.55,2040.55) 12p.1@4117.62,2065.62 ; 4092.55,2076 ccw(c4092.55,2111.45) 12p.1@4117.62,2086.38 ; 4092.55,2076 ccw(c4092.55,2111.45) 12p.1@4117.62,2086.38 ; 4092.55,2076 cw(c4092.55,2040.55) 12p.1@4117.62,2065.62
GND: 102.1 104.1@3318,2426 104.1@3529,2028 104.1@4622,2514 104.1@5202.07,1462 104.1@5202.07,1527 104.1@5202.07,1667 104.2@2747,2437.07 104.2@3677.93,1917 104.2@3677.93,1982 104.2@3677.93,2047 104.2@3677.93,2117 104.2@4252,2877.07 104.2@4267,2517.07 104.2@4488,1912.93 104.2@4677.07,2738 104.2@4967.93,1862 104.2@5083,2527.93 104.2@5202.07,1598 104.2@5202.07,1738 106.1@3761,2122 106.2@2197,2679.08 106.2@2370.92,2457 106.2@2828,2375.92 106.2@3238,2380.92 106.2@3512.93,2252 106.2@3512.93,2317 106.2@4163,2805.92 106.2@4358,2460.92 106.2@4402,1984.08 106.2@4542,2574.08 106.2@4605.92,2817 106.2@4992,2584.08 106.2@5024.08,1953 106.2@5507,2574.08 107.2 4733.A 7333.1 7333.2 7350.1 7350.2 *.1 *.2 ?.1@2230,2425 ?.2@5172.2,2129 ?.2@5420,1880 ?.2@5603,2517.93 LED1.2 oled.1 RST.2 U?.11 U?.12 U?.48 U?.69 五向开关.4 右旋编.6 左旋编.6 检测.1 检测.2 烧录.3 烧录.5 起跑.3 陀螺仪.0 陀螺仪.4 陀螺仪.5 驱动.0 | length 325.3
  Top Layer w10: U?.12@3891.37,1927.91 U?.11@3873.28,1909.82 U?.12@3909.82,1909.82 ; v2(3880,1920) ccw(c3895.04,1926.02) 3895.04,1909.82 ; v2(3880,1920) ccw(c3895.04,1926.02) 3895.04,1909.82 ; v2(3880,1920) ccw(c3895.04,1926.02) 3895.04,1909.82 ; U?.12@3889.28,1923.71 ccw(c3909.81,1931.93) U?.12@3909.81,1909.82 ; U?.12@3889.28,1923.71 ccw(c3909.81,1931.93) U?.12@3909.81,1909.82 ; U?.12@3889.28,1923.71 ccw(c3909.81,1931.93) U?.12@3909.81,1909.82
  Top Layer w20: v1(4739.68,1573.98) 陀螺仪.5@4779.05,1573.98
  Bottom Layer w30: 7350.2@2503.6,2642 7350.1@2503.6,2692 v1(2503.6,2655)
  other v1: 5605,1485 3672.01,1917 3675,1980 3530,2045 3680,2045 3769.41,2050 3675,2120 3769.41,2120 3512.01,2252 3512.01,2317 2828,2375.92 3240,2380 3375,2535 2613,2902.93
  other v3: 3765,2210 3765,2305 2930,2405
Net103_2: 
Net_1: 1k.2@5242.93,2047 ?.1@5247,2129 | length 285.8
  Bottom Layer w10: 1k.2@5247,2051.07 ?.1@5247,2129 ; 5247,2097.32 cw(c5277.7,2097.32) 5255.99,2119.02 ccw(c5277.7,2097.32) 5247,2097.32 ; 5247,2097.32 ccw(c5216.3,2097.32) 5238.01,2119.02 cw(c5216.3,2097.32) 5247,2097.32 ; 1k.2@5234.51,2057.38 ccw(c5204.37,2087.53) 5247,2087.53 cw(c5204.37,2087.53) 1k.2@5234.51,2057.38 ; 5247,2077.38 ccw(c5275.27,2077.38) 5255.28,2057.38 cw(c5275.27,2077.38) 5247,2077.38
Net_2: ?.3@5209.6,2227.43 蜂鸣器.2 | length 907.5
  Bottom Layer w10: 蜂鸣器.2@5111,2243 5126.57,2227.43 ?.3@5209.6,2227.43 ; 蜂鸣器.2@5124.73,2234.78 cw(c5138.07,2226.79) 5146.02,2240.16 ; 蜂鸣器.2@5133.15,2229.38 cw(c5138.5,2226.08) 5141.71,2231.49 cw(c5146.76,2239.99) 蜂鸣器.2@5136.91,2240.82 ; 蜂鸣器.2@5133.31,2229.65 cw(c5146.68,2221.64) 5154.64,2235.04 ; 5177.13,2234.53 ccw(c5184.4,2267.73) ?.3@5202.74,2239.12 ; 5177.13,2234.53 ccw(c5184.4,2267.73) ?.3@5202.74,2239.12 ; 5177.13,2234.53 ccw(c5184.4,2267.73) ?.3@5202.74,2239.12 ; 5178.9,2227.43 cw(c5178.9,2196.72) 5200.61,2218.43 ccw(c5178.9,2196.72) 5178.9,2227.43 ; 5178.9,2227.43 ccw(c5178.9,2258.13) 5200.61,2236.42 cw(c5178.9,2258.13) 5178.9,2227.43 ; 5181.67,2233.54 cw(c5175.81,2206.76) ?.3@5198.89,2221.55 ; 5181.67,2233.54 cw(c5175.81,2206.76) ?.3@5198.89,2221.55 ; 5181.67,2233.54 cw(c5175.81,2206.76) ?.3@5198.89,2221.55 ; ?.3@5209.6,2227.43 cw(c5209.59,2339.12) 5129.62,2261.15 ccw(c5209.59,2339.12) ?.3@5209.6,2227.43 ; 蜂鸣器.2@5108.14,2240.21 ccw(c5138.45,2269.76) 5138.45,2227.43 cw(c5138.45,2269.76) 蜂鸣器.2@5108.14,2240.21 ; 蜂鸣器.2@5115.3,2247.19 ccw(c5162.16,2292.88) 5162.16,2227.43 cw(c5162.16,2292.88) 蜂鸣器.2@5115.3,2247.19 ; 蜂鸣器.2@5122.46,2254.17 ccw(c5185.88,2316) 5185.88,2227.43 cw(c5185.88,2316) 蜂鸣器.2@5122.46,2254.17
NetC4_2: 102.2 106.2@3827.93,2122 L3.2 U?.9 U?.10 | length 1349.3
  Top Layer w10: v2(3820,1980) 3820,1926.91 U?.10@3855.18,1891.72 U?.9@3837.09,1873.63 ; v2@3812.93,1972.93 cw(c3795.86,1955.86) 3820,1955.86 ; v2@3812.93,1972.93 cw(c3795.86,1955.86) 3820,1955.86 ; v2@3812.93,1972.93 cw(c3795.86,1955.86) 3820,1955.86 ; 3820,1955.86 cw(c3844.14,1955.86) v2@3827.07,1972.93 ; 3820,1955.86 cw(c3844.14,1955.86) v2@3827.07,1972.93 ; 3820,1955.86 cw(c3844.14,1955.86) v2@3827.07,1972.93
  Bottom Layer w10: v2(3820,1980) 3820.59,1980.59 3820.59,2050 106.2@3820.59,2120 ; v2@3812.93,1987.07 ccw(c3794.44,2005.56) L3.2@3820.59,2005.56 ; v2@3812.93,1987.07 ccw(c3794.44,2005.56) L3.2@3820.59,2005.56 ; v2@3812.93,1987.07 ccw(c3794.44,2005.56) L3.2@3820.59,2005.56 ; 102.2@3815.58,2041.62 cw(c3803.48,2029.52) 3820.59,2029.52 ; 102.2@3815.58,2041.62 cw(c3803.48,2029.52) 3820.59,2029.52 ; 102.2@3815.58,2041.62 cw(c3803.48,2029.52) 3820.59,2029.52 ; 102.2@3815.58,2062.38 ccw(c3803.48,2074.48) 3820.59,2074.48 ; 102.2@3815.58,2062.38 ccw(c3803.48,2074.48) 3820.59,2074.48 ; 102.2@3815.58,2062.38 ccw(c3803.48,2074.48) 3820.59,2074.48 ; 106.2@3815.58,2111.62 cw(c3803.48,2099.52) 3820.59,2099.52 ; 106.2@3815.58,2111.62 cw(c3803.48,2099.52) 3820.59,2099.52 ; 106.2@3815.58,2111.62 cw(c3803.48,2099.52) 3820.59,2099.52 ; L3.2@3816.16,1988.84 ccw(c3805.48,1999.52) L3.2@3820.59,1999.52 ; L3.2@3816.16,1988.84 ccw(c3805.48,1999.52) L3.2@3820.59,1999.52 ; L3.2@3816.16,1988.84 ccw(c3805.48,1999.52) L3.2@3820.59,1999.52 ; L3.2@3820.59,2002.72 ccw(c3842.72,2002.72) L3.2@3827.07,1987.07 ; L3.2@3820.59,2002.72 ccw(c3842.72,2002.72) L3.2@3827.07,1987.07 ; L3.2@3820.59,2002.72 ccw(c3842.72,2002.72) L3.2@3827.07,1987.07 ; L3.2@3820.59,2003.58 cw(c3874.39,2003.58) 102.2@3836.34,2041.62 ; L3.2@3820.59,2003.58 cw(c3874.39,2003.58) 102.2@3836.34,2041.62 ; L3.2@3820.59,2003.58 cw(c3874.39,2003.58) 102.2@3836.34,2041.62 ; 3820.59,2020.83 ccw(c3865.83,2020.83) L3.2@3833.84,1988.84 ; 3820.59,2020.83 ccw(c3865.83,2020.83) L3.2@3833.84,1988.84 ; 3820.59,2020.83 ccw(c3865.83,2020.83) L3.2@3833.84,1988.84 ; 3820.59,2027.72 cw(c3850.24,2027.72) 102.2@3829.27,2048.69 ; 3820.59,2027.72 cw(c3850.24,2027.72) 102.2@3829.27,2048.69 ; 3820.59,2027.72 cw(c3850.24,2027.72) 102.2@3829.27,2048.69 ; 3820.59,2073.58 cw(c3874.39,2073.58) 106.2@3836.34,2111.62 ; 3820.59,2073.58 cw(c3874.39,2073.58) 106.2@3836.34,2111.62 ; 3820.59,2073.58 cw(c3874.39,2073.58) 106.2@3836.34,2111.62 ; 3820.59,2076.28 ccw(c3850.24,2076.28) 102.2@3829.27,2055.31 ; 3820.59,2076.28 ccw(c3850.24,2076.28) 102.2@3829.27,2055.31 ; 3820.59,2076.28 ccw(c3850.24,2076.28) 102.2@3829.27,2055.31 ; 3820.59,2097.72 cw(c3850.24,2097.72) 106.2@3829.27,2118.69 ; 3820.59,2097.72 cw(c3850.24,2097.72) 106.2@3829.27,2118.69 ; 3820.59,2097.72 cw(c3850.24,2097.72) 106.2@3829.27,2118.69 ; 3820.59,2100.42 ccw(c3874.39,2100.42) 102.2@3836.34,2062.38 ; 3820.59,2100.42 ccw(c3874.39,2100.42) 102.2@3836.34,2062.38 ; 3820.59,2100.42 ccw(c3874.39,2100.42) 102.2@3836.34,2062.38
NetC21_2: 12p.2 | length 403.1
  Bottom Layer w10: 12p.2@4127.93,2143 12p.2@4127.93,2212 ; 12p.2@4117.55,2201.62 cw(c4092.48,2176.55) 4127.93,2176.55 ; 12p.2@4117.55,2201.62 cw(c4092.48,2176.55) 4127.93,2176.55 ; 12p.2@4117.55,2201.62 cw(c4092.48,2176.55) 4127.93,2176.55 ; 12p.2@4117.62,2155.28 ccw(c4092.72,2180.18) 4127.93,2180.18 ; 12p.2@4117.62,2155.28 ccw(c4092.72,2180.18) 4127.93,2180.18 ; 12p.2@4117.62,2155.28 ccw(c4092.72,2180.18) 4127.93,2180.18 ; 4127.93,2176.55 cw(c4163.38,2176.55) 12p.2@4138.31,2201.62 ; 4127.93,2176.55 cw(c4163.38,2176.55) 12p.2@4138.31,2201.62 ; 4127.93,2176.55 cw(c4163.38,2176.55) 12p.2@4138.31,2201.62 ; 4127.93,2180.52 ccw(c4163.62,2180.52) 12p.2@4138.38,2155.28 ; 4127.93,2180.52 ccw(c4163.62,2180.52) 12p.2@4138.38,2155.28 ; 4127.93,2180.52 ccw(c4163.62,2180.52) 12p.2@4138.38,2155.28
NetF1_1: 
NetJ4_4: 
NetL3_1: L3.1 U?.8 | length 250.2
  Top Layer w10: v2(3750,1980) 3755,1975 3755,1919.52 U?.8@3818.99,1855.53 ; v2@3742.93,1972.93 cw(c3713.79,1943.79) 3755,1943.79 ; v2@3742.93,1972.93 cw(c3713.79,1943.79) 3755,1943.79 ; v2@3742.93,1972.93 cw(c3713.79,1943.79) 3755,1943.79
NetLED1_1: 1k.1@3514,2378 LED1.1 | length 461.8
  Bottom Layer w10: v2(3440,2530) 3510,2460 1k.1@3510,2378 ; v2@3440,2520 cw(c3440,2495.86) 3457.07,2512.93 ; v2@3440,2520 cw(c3440,2495.86) 3457.07,2512.93 ; v2@3440,2520 cw(c3440,2495.86) 3457.07,2512.93 ; v2@3450,2530 ccw(c3474.14,2530) 3457.07,2512.93 ; v2@3450,2530 ccw(c3474.14,2530) 3457.07,2512.93 ; v2@3450,2530 ccw(c3474.14,2530) 3457.07,2512.93 ; 1k.1@3501.65,2388.38 ccw(c3481.48,2408.55) 3510,2408.55 ; 1k.1@3501.65,2388.38 ccw(c3481.48,2408.55) 3510,2408.55 ; 1k.1@3501.65,2388.38 ccw(c3481.48,2408.55) 3510,2408.55 ; 3510,2418.36 ccw(c3552.39,2418.36) 1k.1@3522.42,2388.38 ; 3510,2418.36 ccw(c3552.39,2418.36) 1k.1@3522.42,2388.38 ; 3510,2418.36 ccw(c3552.39,2418.36) 1k.1@3522.42,2388.38
PTA0: U?.62 左旋编.3 | length 2044
  Top Layer w10: 左旋编.3@2295,2825 2365,2755 2510,2755 2795,2470 2795,2098.28 2888.28,2005 3222.38,2005 U?.62@3271.96,2054.58 ; 左旋编.3@2295,2798.5 cw(c2295,2734.54) 2340.23,2779.77 ; 左旋编.3@2295,2798.5 cw(c2295,2734.54) 2340.23,2779.77 ; 左旋编.3@2295,2798.5 cw(c2295,2734.54) 2340.23,2779.77 ; 左旋编.3@2295,2808.5 cw(c2295,2768.68) 2323.16,2796.84 ; 左旋编.3@2295,2808.5 cw(c2295,2768.68) 2323.16,2796.84 ; 左旋编.3@2295,2808.5 cw(c2295,2768.68) 2323.16,2796.84 ; 左旋编.3@2311.5,2825 ccw(c2351.32,2825) 2323.16,2796.84 ; 左旋编.3@2311.5,2825 ccw(c2351.32,2825) 2323.16,2796.84 ; 左旋编.3@2311.5,2825 ccw(c2351.32,2825) 2323.16,2796.84 ; 左旋编.3@2321.5,2825 ccw(c2385.46,2825) 2340.23,2779.77 ; 左旋编.3@2321.5,2825 ccw(c2385.46,2825) 2340.23,2779.77 ; 左旋编.3@2321.5,2825 ccw(c2385.46,2825) 2340.23,2779.77
PTA1: U?.61 左旋编.4 | length 2185.2
  Top Layer w10: 左旋编.4@2320,2925 左旋编.4@2295,2925 2345,2975 2450,2975 2495,2930 2495,2805 2880,2420 2880,2070 2925,2025 3206.19,2025 U?.61@3253.86,2072.67 ; 左旋编.4@2295,2941.5 ccw(c2295,2981.32) 2323.16,2953.16 ; 左旋编.4@2295,2941.5 ccw(c2295,2981.32) 2323.16,2953.16 ; 左旋编.4@2295,2941.5 ccw(c2295,2981.32) 2323.16,2953.16 ; 左旋编.4@2295,2951.5 ccw(c2295,3015.46) 2340.23,2970.23 ; 左旋编.4@2295,2951.5 ccw(c2295,3015.46) 2340.23,2970.23 ; 左旋编.4@2295,2951.5 ccw(c2295,3015.46) 2340.23,2970.23 ; 左旋编.4@2311.5,2925 cw(c2351.32,2925) 2323.16,2953.16 ; 左旋编.4@2311.5,2925 cw(c2351.32,2925) 2323.16,2953.16 ; 左旋编.4@2311.5,2925 cw(c2351.32,2925) 2323.16,2953.16 ; 左旋编.4@2321.5,2925 cw(c2385.46,2925) 2340.23,2970.23 ; 左旋编.4@2321.5,2925 cw(c2385.46,2925) 2340.23,2970.23 ; 左旋编.4@2321.5,2925 cw(c2385.46,2925) 2340.23,2970.23
PTA2: U?.60
PTA3: U?.59
PTA6: U?.46 陀螺仪.1 | length 1826.7
  Top Layer w10: U?.46@3507.2,2420.66 3646.01,2281.85 3646.01,1708.99 3710,1645 4595,1645 4621.57,1618.43 陀螺仪.1@4621.57,1573.98
PTA7: U?.45
PTB0: U?.42 检测.4 | length 845.4
  Top Layer w10: U?.42@3579.58,2493.04 3528.5,2544.11 3528.5,2628.5 3590,2690 3590,2895 检测.4@3640,2945 ; 3594.77,2899.77 cw(c3640,2854.54) 3640,2918.5 ccw(c3640,2854.54) 3594.77,2899.77 ; 3594.77,2899.77 ccw(c3549.54,2945) 3613.5,2945 cw(c3549.54,2945) 3594.77,2899.77 ; 3611.84,2916.84 cw(c3640,2888.68) 3640,2928.5 ccw(c3640,2888.68) 3611.84,2916.84 ; 3611.84,2916.84 ccw(c3583.68,2945) 3623.5,2945 cw(c3583.68,2945) 3611.84,2916.84
PTB1: U?.41 检测.3 | length 673.7
  Top Layer w10: 3570,2538.81 3555,2553.81 3555,2610 3640,2695 检测.3@3640,2845 ; 3640,2781.03 cw(c3703.97,2781.03) 3658.74,2826.26 ccw(c3703.97,2781.03) 3640,2781.03 ; 3640,2781.03 ccw(c3576.03,2781.03) 3621.26,2826.26 cw(c3576.03,2781.03) 3640,2781.03 ; 3640,2805.18 cw(c3679.82,2805.18) 3651.66,2833.34 ccw(c3679.82,2805.18) 3640,2805.18 ; 3640,2805.18 ccw(c3600.18,2805.18) 3628.34,2833.34 cw(c3600.18,2805.18) 3640,2805.18
PTB2: U?.40 检测.5 | length 679.7
  Top Layer w10: U?.40@3692.33,2511.14 3731.19,2550 3740,2558.81 检测.5@3740,2845 ; 3740,2781.03 cw(c3803.97,2781.03) 3758.74,2826.26 ccw(c3803.97,2781.03) 3740,2781.03 ; 3740,2781.03 ccw(c3676.03,2781.03) 3721.26,2826.26 cw(c3676.03,2781.03) 3740,2781.03 ; 3740,2805.18 cw(c3779.82,2805.18) 3751.66,2833.34 ccw(c3779.82,2805.18) 3740,2805.18 ; 3740,2805.18 ccw(c3700.18,2805.18) 3728.34,2833.34 cw(c3700.18,2805.18) 3740,2805.18
PTB3: U?.39 检测.6 | length 831.7
  Top Layer w10: U?.39@3710.42,2493.04 3790,2572.62 3790,2895 检测.6@3740,2945 ; 3768.16,2916.84 cw(c3796.32,2945) 3756.5,2945 ccw(c3796.32,2945) 3768.16,2916.84 ; 3768.16,2916.84 ccw(c3740,2888.68) 3740,2928.5 cw(c3740,2888.68) 3768.16,2916.84 ; 3785.23,2899.77 cw(c3830.46,2945) 3766.5,2945 ccw(c3830.46,2945) 3785.23,2899.77 ; 3785.23,2899.77 ccw(c3740,2854.54) 3740,2918.5 cw(c3740,2854.54) 3785.23,2899.77
PTB4: U?.23
PTB5: U?.22
PTC0: U?.32 驱动.4 | length 1364.2
  Top Layer w10: U?.32@3837.09,2366.37 3842.32,2366.37 4090.95,2615 4840,2615 4875.32,2650.32 驱动.4@4875.32,2741.02 ; U?.32@3858.66,2389.84 ccw(c3858.66,2407.04) 3870.83,2394.88 ; U?.32@3858.66,2389.84 ccw(c3858.66,2407.04) 3870.83,2394.88 ; U?.32@3858.66,2389.84 ccw(c3858.66,2407.04) 3870.83,2394.88 ; U?.32@3860.3,2387 cw(c3869.65,2381.61) 3866.85,2392.03 ; U?.32@3860.3,2387 cw(c3869.65,2381.61) 3866.85,2392.03 ; U?.32@3860.3,2387 cw(c3869.65,2381.61) 3866.85,2392.03 ; 4875.32,2704.9 cw(c4891.76,2704.9) 4880.13,2716.52 ccw(c4891.76,2704.9) 4875.32,2704.9 ; 4875.32,2704.9 ccw(c4858.87,2704.9) 4870.5,2716.52 cw(c4858.87,2704.9) 4875.32,2704.9
PTC1: U?.31 驱动.3 | length 1346.4
  Top Layer w10: U?.31@3869.62,2365.38 4087.12,2582.88 4872.88,2582.88 4914.69,2624.69 驱动.3@4914.69,2741.02 ; U?.31@3878.65,2369.85 cw(c3889.66,2369.85) 3881.88,2377.64 ; U?.31@3878.65,2369.85 cw(c3889.66,2369.85) 3881.88,2377.64 ; U?.31@3878.65,2369.85 cw(c3889.66,2369.85) 3881.88,2377.64 ; 4914.69,2704.9 cw(c4931.13,2704.9) 4919.5,2716.52 ccw(c4931.13,2704.9) 4914.69,2704.9 ; 4914.69,2704.9 ccw(c4898.24,2704.9) 4909.87,2716.52 cw(c4898.24,2704.9) 4914.69,2704.9
PTC2: U?.25 驱动.2 | length 1312.3
  Top Layer w10: U?.25@3963.75,2239.71 4284.05,2560 4880,2560 4954.06,2634.06 驱动.2@4954.06,2741.02 ; 4954.06,2704.9 cw(c4970.5,2704.9) 4958.87,2716.52 ccw(c4970.5,2704.9) 4954.06,2704.9 ; 4954.06,2704.9 ccw(c4937.61,2704.9) 4949.24,2716.52 cw(c4937.61,2704.9) 4954.06,2704.9
PTC3: U?.24 驱动.1 | length 1341.4
  Top Layer w10: U?.24@3981.85,2221.61 4300.24,2540 4900,2540 4993.43,2633.43 驱动.1@4993.43,2741.02 ; 4993.43,2704.9 cw(c5009.87,2704.9) 4998.24,2716.52 ccw(c5009.87,2704.9) 4993.43,2704.9 ; 4993.43,2704.9 ccw(c4976.98,2704.9) 4988.61,2716.52 cw(c4976.98,2704.9) 4993.43,2704.9
PTC5: U?.77
PTC6: U?.64